# Altium PCB UKU205.PcbDoc (part 1 of 3)
Units mm, origin at the board's own origin, x right, y up, seen from the top; angles counter-clockwise.
Board outline 374.65 x 264.35 mm, 2 copper layers (Top Layer, Bottom Layer); 253 components, 433 nets, 927 pads, 929 vias.
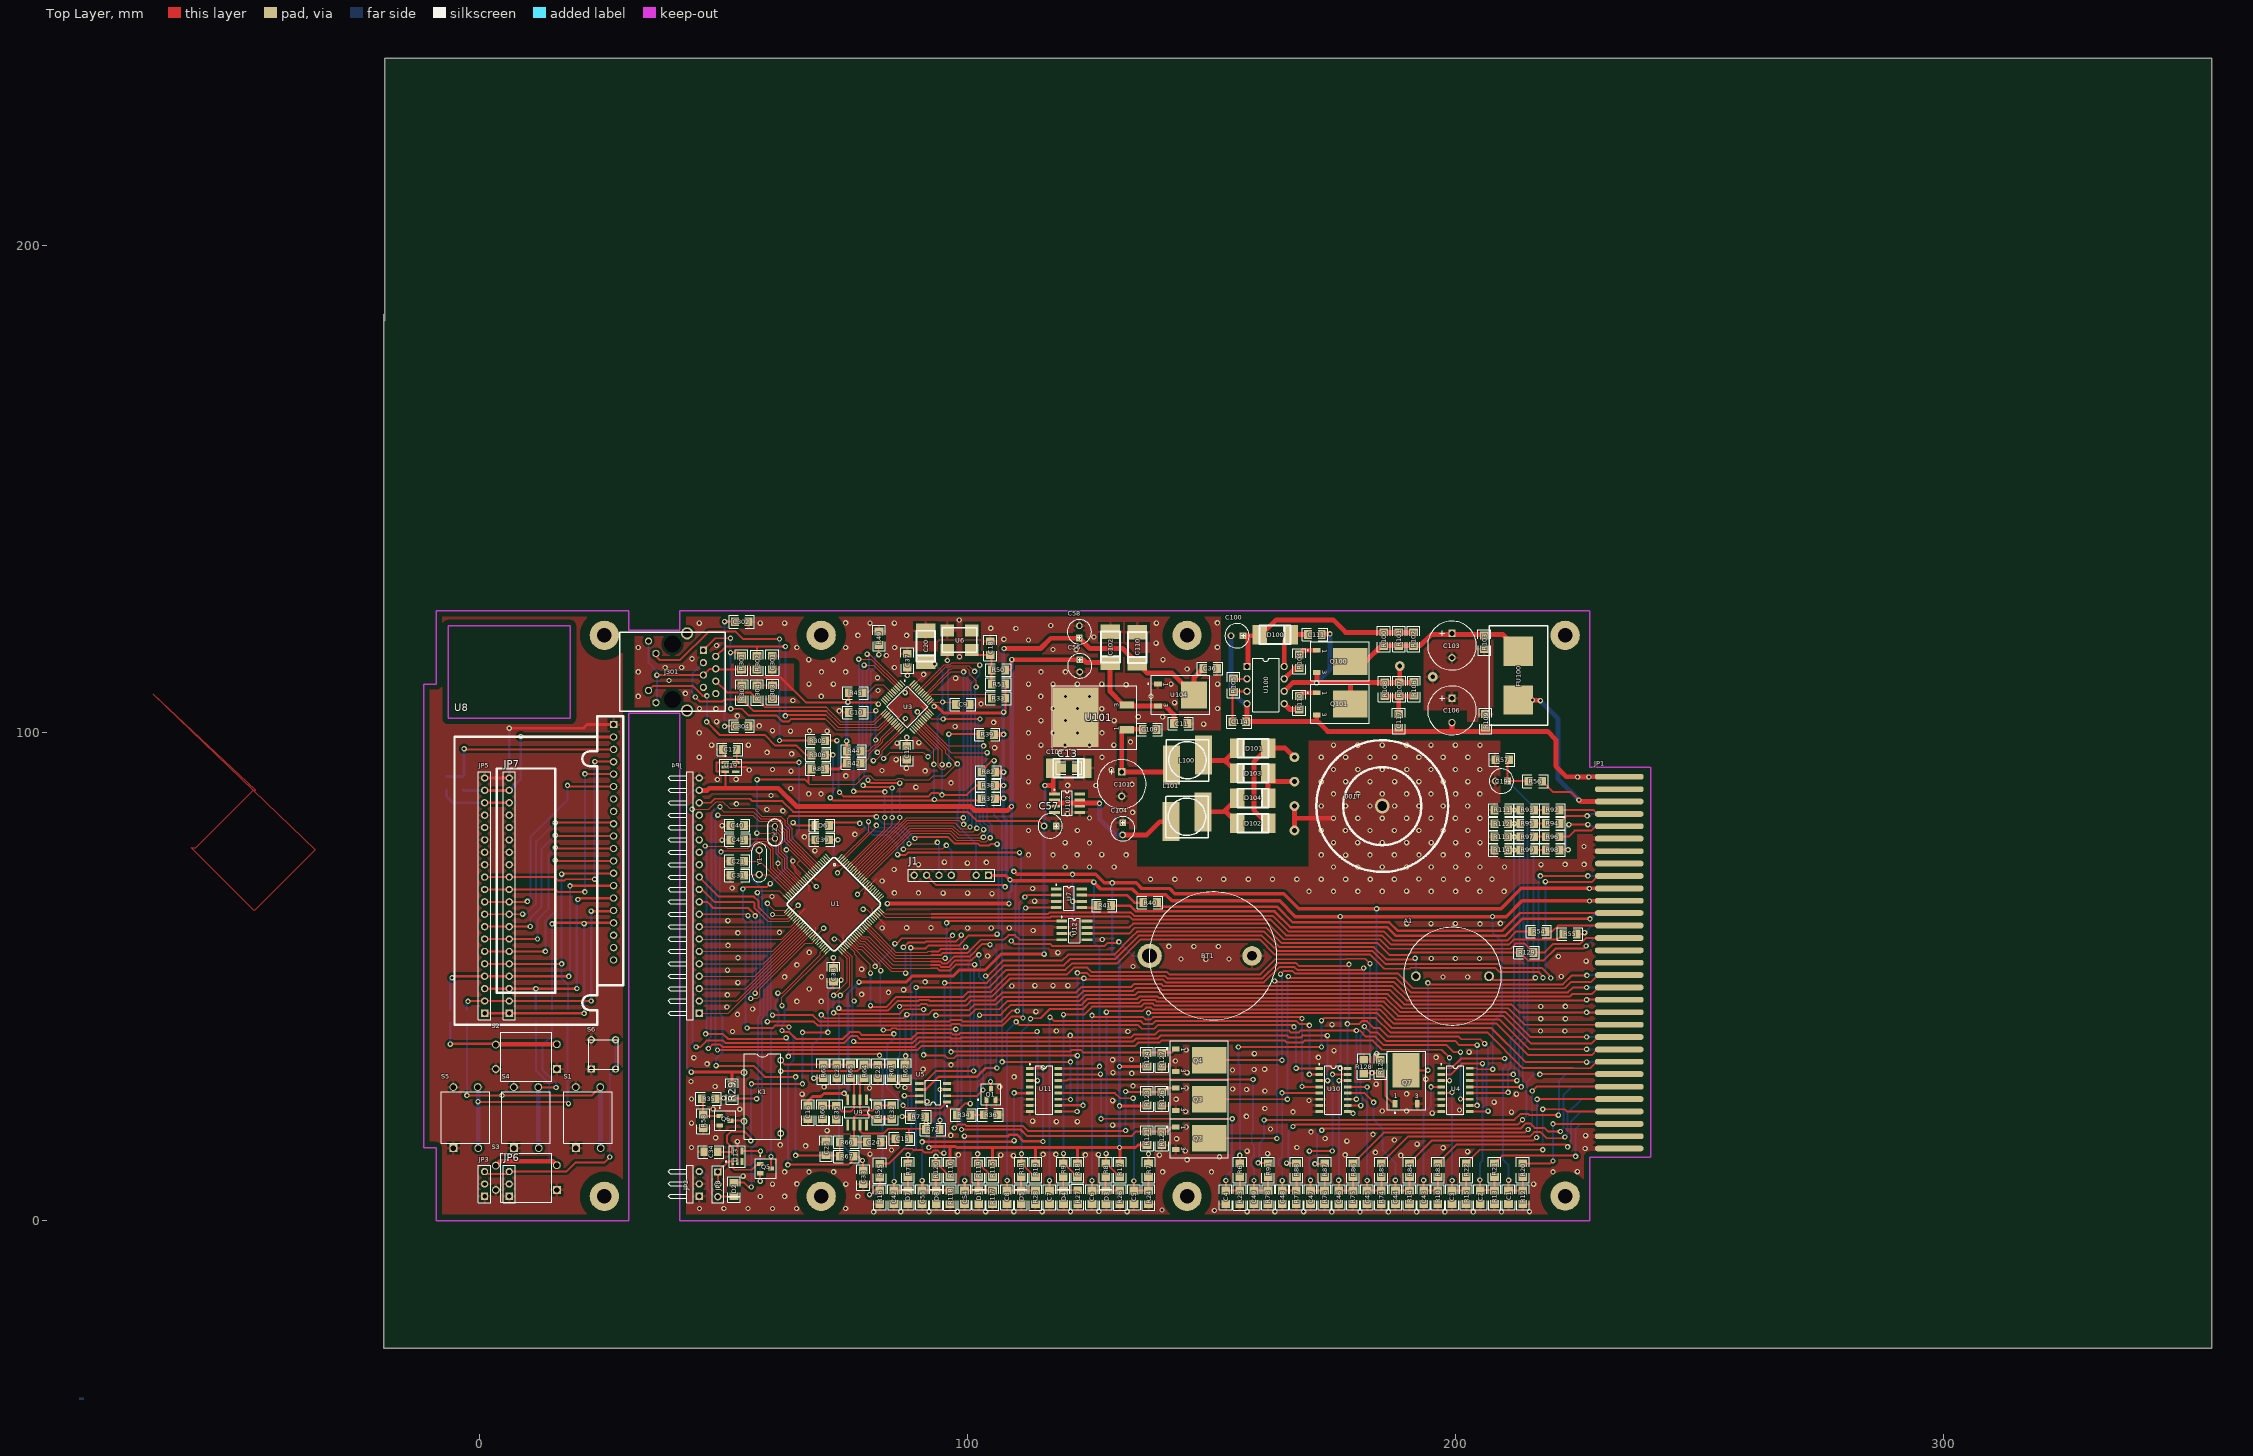
[diagram p0: Top Layer view]
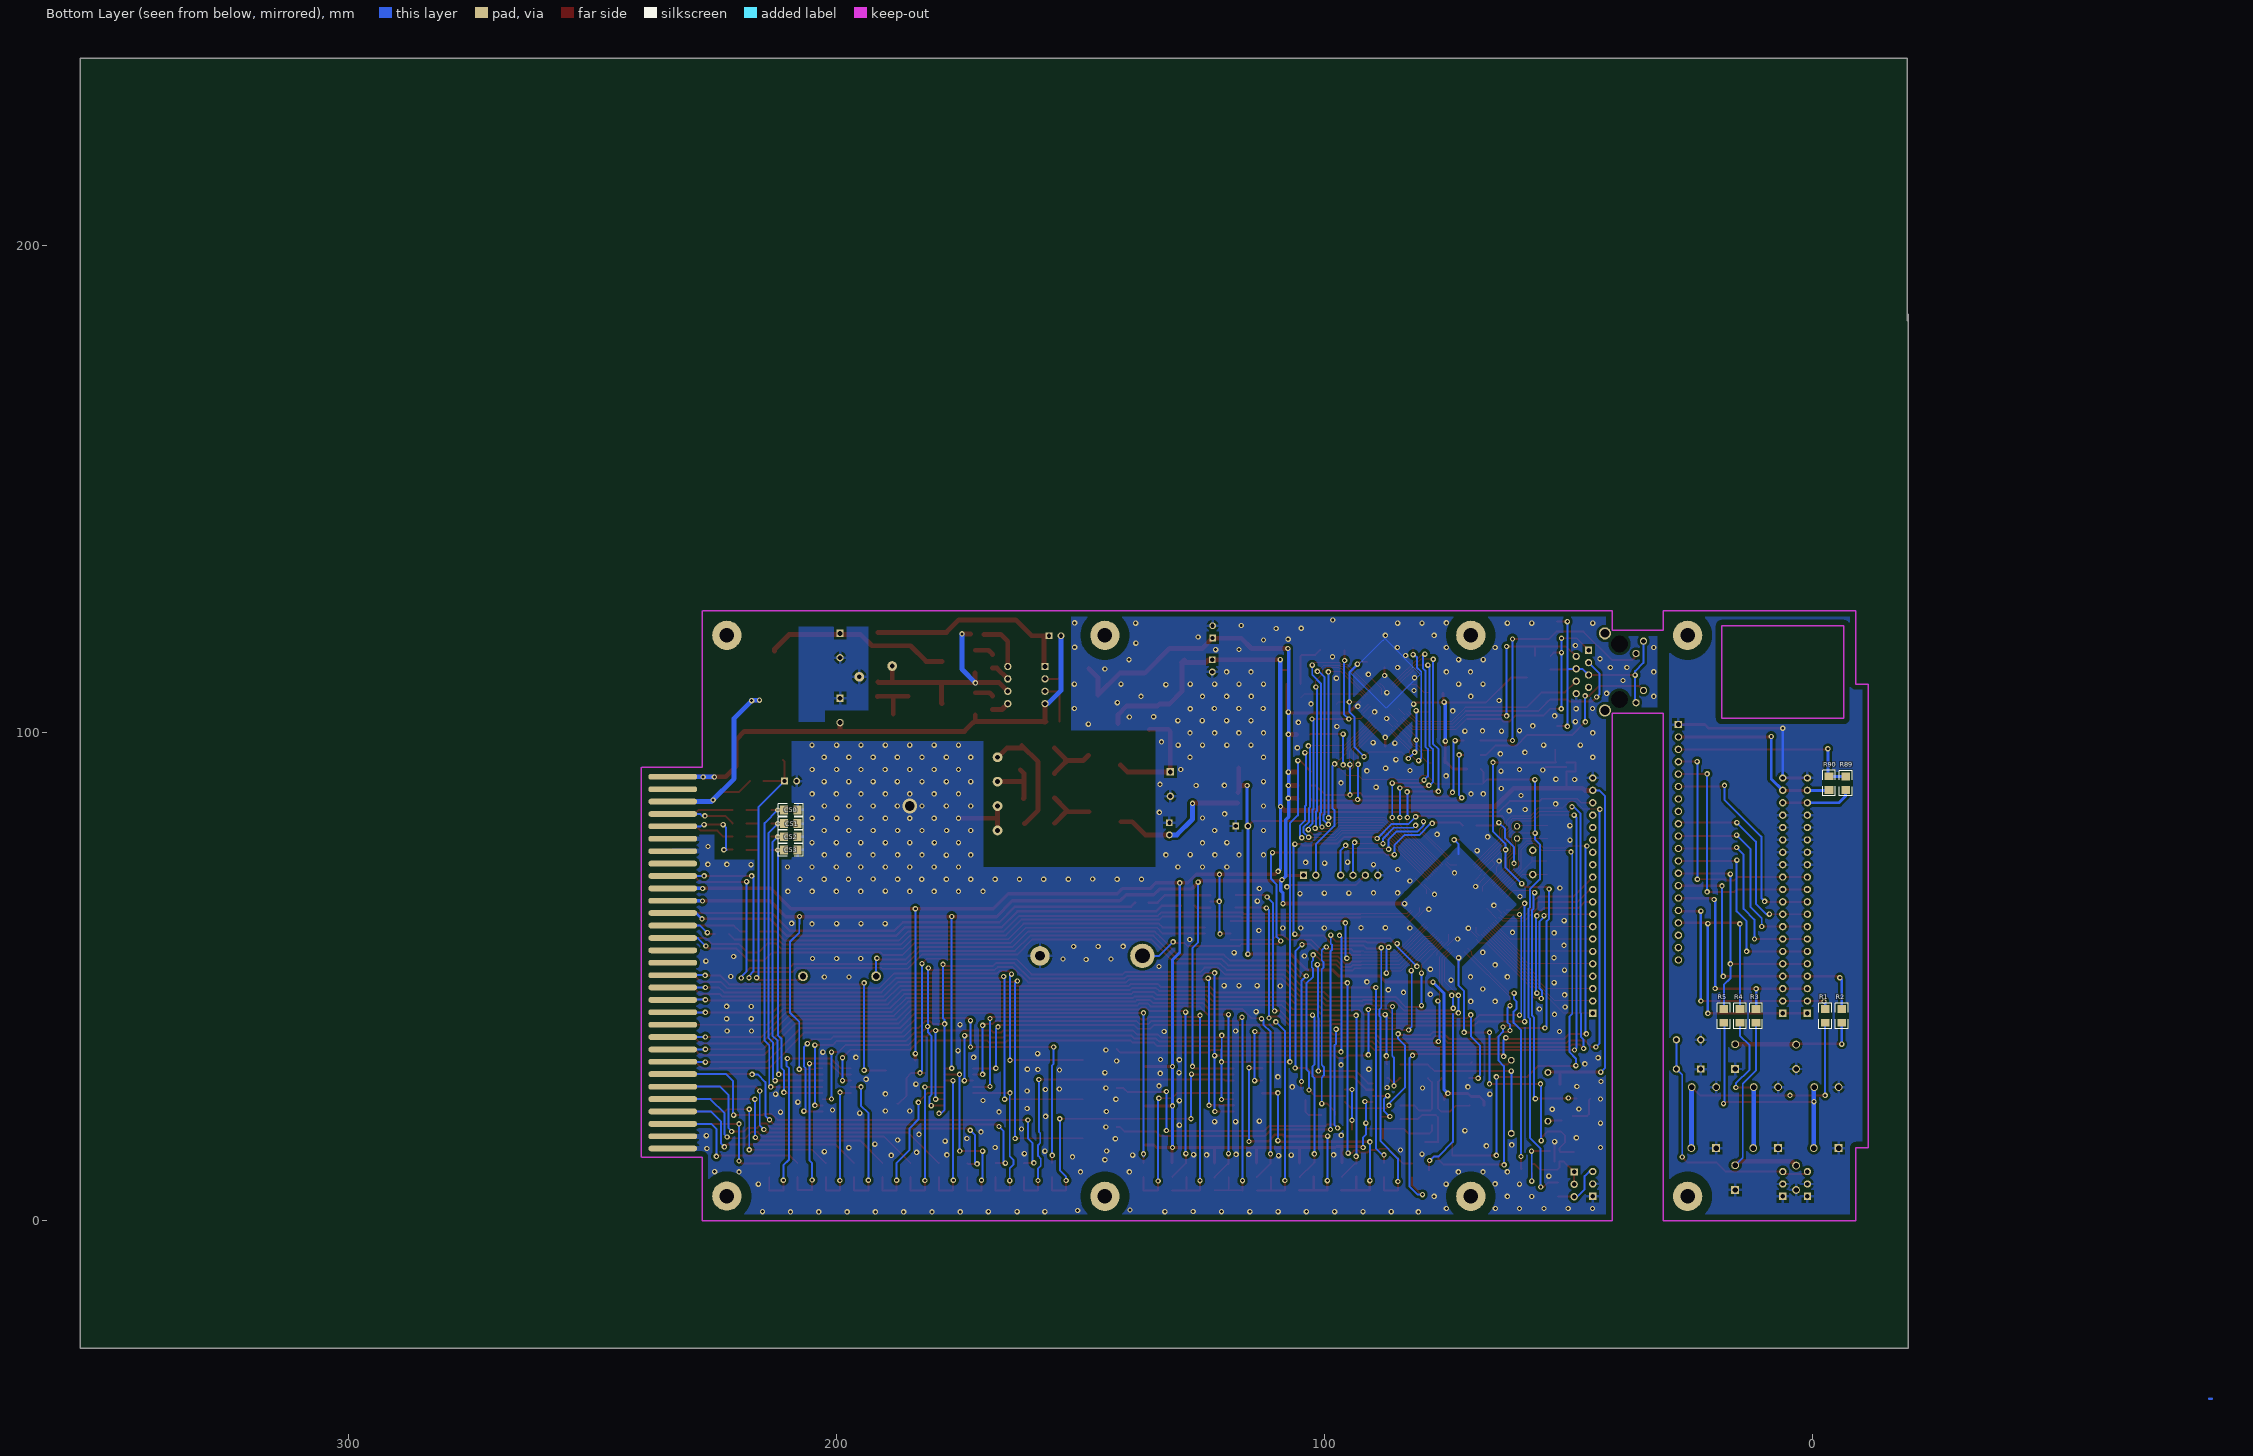
[diagram p1: Bottom Layer view, seen from below]

## Layer stack, top to bottom
Top Layer: signal copper 0.0356
Dielectric: dielectric 0.32, FR-4, Dk 4.8
Bottom Layer: signal copper 0.0356

## Board outline
-19.65,185.8 -19.65,-26.1 355,-26.1 355,238.25 -19.45,238.25 -19.45,184.45

## Design rules (kind name [scope] priority, off if disabled: settings)
Clearance Clearance_1 [InPoly vs InNet('+5VIZ') Or InNet('-5VIZ')] p1: gap=1
Clearance "Для разъёма" [InComponent(JP1)] p2: gap=0.6
Clearance Poly_Poly [InPoly vs InPoly] p3: gap=1
Clearance Keep_Out [OnLayer('Keep-Out Layer') vs Not InNet('NetJ2_5')] p4: gap=1
Clearance Holes [InPoly vs HasPad('Free-0')  Or HasPad('J2-10')  Or HasPad('J2-11')] p5: gap=2
Clearance Poly [InPoly] p6: gap=0.5
Clearance [All] p7: gap=0.15
Clearance Высоковольтное [InNet('+UOUT') or
InNet('U1') or
InNet('U2') or
InNet('UAKB') or
InNet('-UOUT') vs InPoly] p8: gap=0.6
ComponentClearance [All] p1: gap=0.254 collisioncheckmode=0
HoleSize [All] p1: absolutevalues=TRUE maxlimit=5 minlimit=0.025 maxpercent=80.000 minpercent=20.000
PolygonConnect PolygonConnect_2 [InComponent(JP1)] p1: connectstyle=Relief reliefconductorwidth=1 reliefentries=4 polygonreliefangle="90 Angle"
PolygonConnect PolygonConnect_1 [HasPad('JP101-7') or
HasPad('JP6-7') or
HasPad('JP6-9') or
HasPad('JP6-10') Or InComponent(U101)] p2: connectstyle=Direct reliefconductorwidth=0.254 reliefentries=4 polygonreliefangle="90 Angle"
PolygonConnect [All] p3: connectstyle=Relief reliefconductorwidth=0.5 reliefentries=4 polygonreliefangle="90 Angle"
RoutingLayers [All] p1: top layer=Horizontal bottom layer=Vertical
RoutingVias [All] p1: holewidth=0.6 width=1.1 viastyle="Through Hole" minholewidth=0.6 minwidth=1.1 maxholewidth=0.7 maxwidth=1.2
SolderMaskExpansion [All] p1: expansion=0.102
TestPointUsage [All] p1: valid=0 allowmultiple=FALSE
Testpoint [All] p1: side=15 testpointundercomponent=TRUE minsize=1.016 maxsize=2.54 preferedsize=1.524 minholesize=0 maxholesize=1.016 preferedholesize=0.813 testpointgrid=0.025 style=1023 order=-539222988
Width [All] p1: maxlimit=2 minlimit=0.2 preferedwidth=0.254 toplayer_prefwidth=0.5 bottomlayer_prefwidth=0.4 minimp=50.000000 maximp=50.000000 favimp=50.000000
15 further rules are at their usual default settings.

## Classes and differential pairs
component class ETHERNET: C9 C10 C12 C18 C20 C301 C302 C303 C304 J301 R33 R37 R38 R39 R42 R44 R45 R49 R50 R51 R301 R302 R303 R304 R305 R306 U3 U6
component class POWER: BT1 C11 C13 C36 C56 C57 C58 C100 C101 C102 C103 C104 C105 C106 C109 C110 C111 C114 C117 D6 D100 D101 D102 D103 D104 FU100 L100 L101 Q100 Q101 R100 R101 R102 R103 R104 R105 R106 R107 R108 R109 R110 T100 U100 U101 U102 U104
component class cpu_board: A1 C15 C16 C17 C19 C21 C22 C23 C24 C25 C31 C32 C33 C34 C35 C37 C38 C39 C40 C41 D2 J1 JP1 JP2 JP4 JP8 K1 Q1 Q5 Q6 R29 R34 R35 R36 R40 R41 R54 R55 R56 R57 R58 R59 R60 R61 R62 R63 R64 R65 R66 R67 R81 R82 R129 U1 U7 U9 U12 U13 U19 Y1 Y2
component class FACE: JP3 JP5 JP6 JP7 R1 R2 R3 R4 R5 R89 R90 S1 S2 S3 S4 S5 S6 TX0 U8
component class RS232: R72 R73 U5
component class ANALOG_: C1 C2 C3 C4 C5 C6 C7 C8 C42 C43 C44 C45 C46 C47 C48 C49 C50 C51 C52 C53 C54 C55 D1 D3 D4 D5 D7 D8 Q2 Q3 Q4 Q7 R6 R7 R8 R9 R10 R11 R12 R13 R14 R15 R16 R17 R18 R19 R20 R21 R22 R23 R24 R25 R26 R27 R28 R71 R74 R75 R76 R77 R78 R83 R84 R85 R86 R87 R88 R91 R92 R93 R94 R95 R96 R97 R98 R99 R111 R112 R113 R114 R115 R116 R117 R118 R119 R120 R121 R122 R123 R124 R125 R126 R127 R128 U4 U10 U11

## Components (designator, comment, footprint, x,y, rotation, side; value= is the part's Value field where it differs from the comment)
A1 "EFM-260" Pjezo15 194.4,50.1 r0 top
BT1 "CR2032" BAT_SUPP 150.3,54.3 r90 top
C1 "1.0" C3216-1206#1 210.9,4.8 r270 top
C2 "1.0" C3216-1206#1 205.1,4.8 r270 top
C3 "1.0" C3216-1206#1 199.3,4.8 r270 top
C4 "1.0" C3216-1206#1 152.9,4.8 r270 top
C5 "1.0" C3216-1206#1 134.1,4.8 r270 top
C6 "1.0" C3216-1206#2 125.5,4.8 r270 top
C7 "1.0" C3216-1206#2 116.8,4.8 r270 top
C8 "1.0" _1206#1 108.1,4.8 r270 top
C9 "0.1" C3216-1206#1 99.05,105.8 r0 top
C10 "0.1" C3216-1206#1 77.05,104.2 r180 top
C11 "1.0" C3216-1206#3 143.7,101.9 r180 top
C12 "0.1" _1206#2 87.55,95.9 r270 top
C13 "1.0" C3216-1206#3 120.8,92.8 r0 top
C15 "1.0" C3216-1206#1 86.6,16.8 r0 top
C16 "1.0" C3216-1206#1 67.3,22.2 r90 top
C17 "1.0" _1206#2 51.3,96.6 r0 top
C18 "0.1" _1206#2 104.65,117.4 r90 top
C19 "22.0x50" el3 210.7,90.1 r180 top
C20 "10.0x25 tantal" CAP_EL_6_3#1 91.45,114.6 r90 top
C21 "10" _1206#2 52.8,73.7 r0 top
C22 "1.0" _1206#2 81.6,30.6 r90 top
C23 "1.0" _1206#2 73.2,30.6 r270 top
C24 "1.0" _1206#2 80.8,16.1 r180 top
C25 "1.0" _1206#2 71,14.8 r270 top
C31 "10" _1206#2 52.8,70.8 r0 top
C32 "0.1" _1206#2 84.45,22.25 r270 top
C33 "1.0" _1206#2 78.6,8.9 r90 top
C34 "1.0" _1206#1 47.4,14.1 r180 top
C35 "0.1" _1206#2 73.1,22.15 r270 top
C36 "0.1" C3216-1206#3 149.7,113.2 r180 top
C37 "1.0" _1206#2 87.65,114.8 r270 top
C38 "1.0" _1206#2 72.5,50.4 r90 top
C39 "1.0" _1206#2 70.2,78.1 r0 top
C40 "33" _1206#2 52.8,81 r0 top
C41 "33" _1206#2 52.8,78.05 r0 top
C42 "1n0" _1206#2 84.9,4.8 r270 top
C43 "1.0" C3216-1206#3 193.5,4.8 r270 top
C44 "1.0" C3216-1206#3 187.7,4.8 r270 top
C45 "1.0" C3216-1206#3 181.9,4.8 r270 top
C46 "1.0" C3216-1206#3 176.1,4.8 r270 top
C47 "1.0" C3216-1206#3 170.3,4.8 r270 top
C48 "1.0" C3216-1206#3 164.5,4.8 r270 top
C49 "1.0" C3216-1206#3 158.7,4.8 r270 top
C50 "1.0" C3216-1206#3 209.4,84.2 r180 bottom
C51 "1.0" C3216-1206#3 209.4,81.4 r180 bottom
C52 "1.0" C3216-1206#3 209.4,78.7 r180 bottom
C53 "1.0" C3216-1206#3 209.4,76 r180 bottom
C54 "1.0" _1206#1 99.4,4.8 r270 top
C55 "1.0" _1206#1 90.7,4.8 r270 top
C56 "22.0 x 35" el3 123,115 r270 top
C57 "22.0 x 35" el3 118.2,80.9 r180 top
C58 "22.0 x 35" el3 122.899,119.45 r90 top
C100 "22.0x50" el3 156.5,119.9 r180 top
C101 "220.0x25" el5 131.6,87 r90 top
C102 "10.0x25 tantal" CAP_EL_6_3#1 129.3,114.4 r90 top
C103 "220.0x63" el5 199.293,115.4 r90 top
C104 "22.0 x 35" el3 131.8,81.6 r270 top
C105 "10.0x25 tantal" CAP_EL_6_3#1 123.9,92.8 r180 top
C106 "220.0x63" el5 199.293,102.1 r90 top
C109 "0.1" C3216-1206#1 137.3,100.7 r180 top
C110 "10.0x25 tantal" CAP_EL_6_3#2 134.8,114.3 r90 top
C111 "0.1" C3216-1206#1 171.2,120.15 r0 top
C114 "1n0x1000" _1206#2 155.7,102.3 r0 top
C117 "1n0x1000" _1206#2 188.4,102.45 r270 top
C301 "0.1" C3216-1206#1 59.95,114.4 r270 top
C302 "0.1" C3216-1206#1 53.7,122.8 r180 top
C303 "0.1" C3216-1206#1 60,108.35 r90 top
C304 "0.1" C3216-1206#1 53.7,101.4 r180 top
D1 "BZV55-C5V6" _1206d#1 102.3,4.8 r270 top
D2 "LL4148" _1206d#2 52.1,6.4 r90 top
D3 "BZV55-C5V6" _1206d#1 128.4,4.8 r270 top
D4 "BZV55-C5V6" _1206d#1 119.7,4.8 r270 top
D5 "BZV55-C5V6" _1206d#1 111,4.8 r270 top
D6 "LL4148" _1206d#2 70.2,81 r0 top
D7 "BZV55-C3V9" _1206d#2 87.8,4.8 r270 top
D8 "BZV55-C5V6" _1206d#1 93.6,4.8 r270 top
D100 "10BQ060" D_6_3 166.2,120.1 r180 top
D101 "10BQ060" D_6_3 155.318,96.863 r0 top
D102 "10BQ060" D_6_3 161.65,81.487 r180 top
D103 "10BQ060" D_6_3 155.318,91.7 r0 top
D104 "10BQ060" D_6_3 161.65,86.65 r180 top
FU100 "5A(2Б-1В)" FUSE2 212.9,111.75 r90 top
J1 "LPC_CONN" HDR1X7 104.3,70.8 r180 top
J301 "J0011D21B" J0011D21B 39.5,112.5 r90 top
JP1 "Header 31X2" sl-62f 233.6,91 r270 top
JP2 "Header 3H" HDR1X3H 45,5 r90 top
JP3 "Header 3" HDR1X3#1 1,5 r90 top
JP4 "Header 20H" HDR1X20H 45,42.5 r90 top
JP5 "Header 20" HDR1X20 1,42.5 r90 top
JP6 "Header 3" HDR1X3#1 6.05,5 r90 top
JP7 "Header 20" HDR1X20 6.05,42.5 r90 top
JP8 "PLS-3" HDR1X3#2 48.8,10 r270 top
K1 "DH1A" kuan 54.2,32.9 r270 top
L100 "SDR0805-390KL" L10x10 140,99.5 r270 top
L101 "SDR0805-390KL" L10x10 139.9,87.9 r270 top
Q1 "BC846" SO-G3#1 104.8,25.9 r0 top
Q2 "IRLR120" SIP-G3/E8#1 146.1,16.9 r270 top
Q3 "IRLR120" SIP-G3/E8#1 146.1,24.9 r270 top
Q4 "IRLR120" SIP-G3/E8#1 146.1,32.9 r270 top
Q5 "IRLML2402" SO-G3#2 58.6,10.7 r270 top
Q6 "BC846" SO-G3#1 50.3,20.5 r270 top
Q7 "IRLR120" SIP-G3/E8#1 189.9,27.4 r0 top
Q100 "IRFR120" SIP-G3/E8#2 175,114.65 r270 top
Q101 "IRFR120" SIP-G3/E8#2 175,105.95 r270 top
R1 "2K7" _1206#2 -2.65,42 r90 bottom
R2 "2K7" _1206#2 -6.05,42 r90 bottom
R3 "2K7" _1206#2 11.516,42 r90 bottom
R4 "2K7" _1206#2 14.824,42 r90 bottom
R5 "2K7" _1206#2 18.132,42 r90 bottom
R6 "2K7" _1206#2 155.8,10.4 r90 top
R7 "2K7" _1206#2 137.1,10.4 r90 top
R8 "2K7" _1206#1 128.3,10.4 r90 top
R9 "2K7" _1206#1 119.6,10.4 r90 top
R10 "1K0" _1206#1 196.4,4.8 r270 top
R11 "2K7" _1206#1 111,10.4 r90 top
R12 "1K0" _1206#2 213.8,4.8 r270 top
R13 "1K0" _1206#2 208,4.8 r270 top
R14 "1K0" _1206#1 190.6,4.8 r270 top
R15 "1K0" _1206#2 202.2,4.8 r270 top
R16 "1K0" _1206#2 82,4.8 r270 top
R17 "1K0" _1206#1 131.2,10.4 r90 top
R18 "1K0" _1206#1 122.5,10.4 r90 top
R19 "1K0" _1206#1 113.9,10.4 r90 top
R20 "33K" _1206#2 213.8,10.4 r90 top
R21 "33K" _1206#2 208,10.4 r90 top
R22 "33K" _1206#2 202.2,10.4 r90 top
R23 "10K" _1206#2 155.8,4.8 r90 top
R24 "10K" _1206#2 137.1,4.8 r90 top
R25 "10K" _1206#2 82,10.3 r90 top
R26 "10K" _1206#1 131.2,4.8 r90 top
R27 "10K" _1206#1 122.55,4.85 r90 top
R28 "10K" _1206#1 113.9,4.8 r90 top
R29 "1K0" _1206#2 51.7,26.5 r270 top
R33 "2K2" _1206#2 106.35,107.1 r0 top
R34 "1K0" _1206#2 99.2,21.7 r0 top
R35 "1K0" _1206#2 46.9,25 r180 top
R36 "10K" _1206#2 104.7,21.7 r180 top
R37 "2K2" _1206#2 104.25,86.5 r0 top
R38 "2K2" _1206#2 104.25,89.2 r0 top
R39 "2K2" _1206#2 104.05,99.7 r0 top
R40 "K10" _1206#2 137.4,65.2 r180 top
R41 "K10" _1206#2 128,64.6 r180 top
R42 "2K2" _1206#2 76.65,93.8 r180 top
R44 "2K2" _1206#2 76.65,96.3 r180 top
R45 "10K" _1206#2 77.05,108.2 r180 top
R49 "4K87" _1206#2 81.85,119.4 r270 top
R50 "1R" _1206#2 106.35,112.9 r0 top
R51 "1R" _1206#2 106.35,110 r0 top
R54 "1K0" _1206#2 217.1,59.3 r0 top
R55 "1K0" _1206#2 223.5,58.8 r0 top
R56 "10K" _1206#2 216.4,90.1 r0 top
R57 "2K7" _1206#2 209.6,94.5 r0 top
R58 "10K" _1206#2 45.8,20.4 r90 top
R59 "20K" _1206#2 81.6,22.25 r90 top
R60 "20K" _1206#2 70.25,22.2 r90 top
R61 "10R" _1206#2 84.4,30.6 r270 top
R62 "10R" _1206#2 87.2,30.6 r270 top
R63 "10R" _1206#2 70.4,30.6 r270 top
R64 "2K0" _1206#2 78.8,30.6 r270 top
R65 "2K0" _1206#2 76,30.6 r270 top
R66 "20K" _1206#2 75.2,16.1 r180 top
R67 "20K" _1206#2 75.2,13.2 r0 top
R71 "2K7" _1206#2 87.8,10.4 r90 top
R72 "2K7" _1206#1 92.9,18.7 r180 top
R73 "2K7" _1206#1 89.9,21.3 r180 top
R74 "1K0" _1206#1 184.8,4.8 r270 top
R75 "1K0" _1206#1 179,4.8 r270 top
R76 "1K0" _1206#1 173.2,4.8 r270 top
R77 "1K0" _1206#1 167.4,4.8 r270 top
R78 "1K0" _1206#1 161.6,4.8 r270 top
R81 "10K" _1206#2 69.4,92.6 r0 top
R82 "10K" _1206#2 104.25,92 r180 top
R83 "33K" _1206#1 196.4,10.4 r90 top
R84 "33K" _1206#1 190.6,10.4 r90 top
R85 "33K" _1206#1 184.8,10.4 r90 top
R86 "33K" _1206#1 179,10.4 r90 top
R87 "33K" _1206#1 173.2,10.4 r90 top
R88 "33K" _1206#1 167.4,10.4 r90 top
R89 "7K5" _1206#2 -6.85,89.7 r90 bottom
R90 "2K2" _1206#2 -3.45,89.7 r270 bottom
R91 "33K" _1206#1 161.6,10.4 r90 top
R92 "6K2" _1206#1 219.9,84.2 r180 top
R93 "6K2" _1206#1 214.7,84.2 r180 top
R94 "6K2" _1206#1 219.9,81.4 r180 top
R95 "6K2" _1206#1 214.7,81.4 r180 top
R96 "6K2" _1206#1 219.9,78.7 r180 top
R97 "6K2" _1206#1 214.7,78.7 r180 top
R98 "6K2" _1206#1 219.9,76 r180 top
R99 "6K2" _1206#1 214.7,76 r180 top
R100 "33K" _1206#2 185.299,119.25 r90 top
R101 "33K" _1206#2 188.4,119.25 r90 top
R102 "33K" _1206#2 191.4,119.25 r90 top
R103 "20K" _1206#2 205.9,118.55 r270 top
R104 "22R" _1206#2 168,114.7 r90 top
R105 "15K" _1206#2 154.5,109.8 r90 top
R106 "30R" _1206#2 191.501,109 r270 top
R107 "30R" _1206#2 188.5,108.95 r270 top
R108 "30R" _1206#2 185.5,108.95 r270 top
R109 "20K" _1206#2 206.2,102.45 r270 top
R110 "22R" _1206#2 168,106.2 r90 top
R111 "1K0" _1206#1 209.4,84.2 r0 top
R112 "1K0" _1206#1 209.4,81.4 r0 top
R113 "1K0" _1206#1 209.4,78.7 r0 top
R114 "1K0" _1206#1 209.4,76 r0 top
R115 "1K0" _1206#1 105.1,10.4 r90 top
R116 "1K0" _1206#1 96.4,10.4 r90 top
R117 "10K" _1206#1 105.1,4.8 r90 top
R118 "10K" _1206#1 96.4,4.8 r90 top
R119 "2K7" _1206#1 102.2,10.4 r90 top
R120 "2K7" _1206#1 93.5,10.4 r90 top
R121 "1K0" _1206#1 136.8,16.9 r270 top
R122 "10K" _1206#1 139.8,16.9 r270 top
R123 "1K0" _1206#1 136.8,25 r270 top
R124 "1K0" _1206#1 136.8,33 r270 top
R125 "1K0" _1206#1 184.6,31.6 r90 top
R126 "10K" _1206#1 139.8,25 r270 top
R127 "10K" _1206#1 139.8,33 r270 top
R128 "10K" _1206#1 181.2,31.6 r90 top
R129 "K10" _1206#2 214.6,55 r0 top
R301 "49.9R" _1206#2 53.65,114.4 r270 top
R302 "49.9R" _1206#2 56.85,114.4 r90 top
R303 "49.9R" _1206#2 53.75,108.3 r90 top
R304 "49.9R" _1206#2 56.85,108.3 r270 top
R305 "K10" _1206#2 69.4,98.4 r0 top
R306 "K10" _1206#2 69.4,95.5 r0 top
S1 "SWT-9" SWT-9 19.7,14.9 r90 top
S2 "SWT-9" SWT-9 15.8,31.1 r180 top
S3 "SWT-9" SWT-9 15.8,6.3 r180 top
S4 "SWT-9" SWT-9 7,14.9 r90 top
S5 "SWT-9" SWT-9 -5.4,14.9 r90 top
S6 "SWT-6" SWT-6 22.85,31.1 r90 top
T100 "T-UKU202-60/48" trans_ring1 185,85 r0 top
U1 "LPC2368FBD100" LPC2368 72.6,64.9 r225 top
U3 "DP8348C" F-QFP7X7-G48/N 87.65,105.3 r315 top
U4 "MC14051BD" SO-G16/C5.85#1 200,26.8 r270 top
U5 "25LC640" SO-G8/D5 92.95,26.25 r90 top
U6 "KXO-97-50MGz" KXO-97 98.35,119 r180 top
U7 "UCC37324" SO-G8#1 120.8,66.1 r270 top
U8 "WG1232D" WG1232D 9.45,69.7 r270 top
U9 "OP07CS" SO-G8#1 77.35,22.2 r180 top
U10 "MC14051BD" SO-G16/C5.85#2 175,26.8 r270 top (schematic designator U?)
U11 "MC14051BD" SO-G16/C5.85#2 115.7,26.8 r270 top
U12 "TJA1050" SO-G8#1 121.9,59.5 r270 top
U13 "TPS3823" SO-G5/P.95#1 52.8,13.2 r0 top
U19 "TPS76333" SO-G5/P.95#2 51.4,93 r270 top
U100 "IR2155" DIP-8/D11 161.1,109.8 r270 top
U101 "7805" D2PAK 127.4,103.2 r90 top
U102 "L79L05ACD" SO-G8#2 120.4,85.6 r270 top
U104 "REG1117-3.3" SIP-G3/C7.4 142.7,107.8 r270 top
Y1 "10MGz" QWARZ1 57.3,75.95 r270 top
Y2 "32768" QWARZ2 60.5,80.85 r270 top

## Footprints (in the part's own frame and the unit in brackets; to place one, negate y for a bottom-side part, rotate by r counter-clockwise, add the part's x,y. Pads: shape width x height; smd on the part's side, far side on the other; paste and mask are expansions set on the pad)
_1206#1 [mm]
  rect 1.6x1.8 smd: 1(-1.409,-0.014) 2(1.391,-0.014)
  silkscreen extent -2.61,-1.31 2.59,1.29
_1206#2 [mm]
  rect 1.6x1.8 smd: 1(-1.412,-0.007) 2(1.388,-0.007)
  silkscreen extent -2.61,-1.31 2.59,1.29
_1206d#1 [mm]
  rect 1.6x1.8 smd: 1(1.403,-0.017) 2(-1.397,-0.017)
  silkscreen extent -2.6,-1.32 2.6,1.28
_1206d#2 [mm]
  rect 1.6x1.8 smd: 1(1.395,-0.009) 2(-1.405,-0.009)
  silkscreen extent -2.6,-1.31 2.6,1.29
BAT_SUPP [mm]
  round 5 hole 3: 1(-0.009,12.995)
  round 4 hole 2: 2(-0.009,-8.005)
  silkscreen extent -13.11,-13.11 13.09,13.09
C3216-1206#1 [mm]
  rect 1.6x1.8 smd: 1(-1.405,0.002) 2(1.395,0.002)
  silkscreen extent -2.6,-1.3 2.6,1.3
C3216-1206#2 [mm]
  rect 1.6x1.8 smd: 1(-1.405,-0.006) 2(1.395,-0.006)
  silkscreen extent -2.6,-1.31 2.6,1.29
C3216-1206#3 [mm]
  rect 1.6x1.8 smd: 1(-1.4,0) 2(1.4,0)
  silkscreen extent -2.6,-1.3 2.6,1.3
CAP_EL_6_3#1 [mm]
  rect 3x4 smd: 1(-0.011,0.006) 2(6.339,0.006)
  silkscreen extent -0.01,-1.9 6.34,1.91
CAP_EL_6_3#2 [mm]
  rect 3x4 smd: 1(0.001,0.015) 2(6.351,0.015)
  silkscreen extent 0,-1.89 6.35,1.92
D2PAK [mm]
  rect 1.5x3 smd: 1(-2.558,-5.253) 3(2.522,-5.253)
  rect 12.2x9.3 smd: 2(-0.018,5.247)
  silkscreen extent -6.52,-8.1 6.48,10
D_6_3 [mm]
  rect 3x4 smd: 1(6.341,0.006) 2(-0.009,0.006)
  silkscreen extent -0.01,-1.9 6.34,1.91
DIP-8/D11 [mm]
  rect 1.5x1.5 hole 0.95: 1(-3.803,-3.816)
  round 1.5 hole 0.95: 2(-1.263,-3.816) 3(1.277,-3.816) 4(3.817,-3.816) 5(3.817,3.804) 6(1.277,3.804) 7(-1.263,3.804) 8(-3.803,3.804)
  silkscreen extent -5.49,-2.66 5.51,2.64
el3 [mm]
  rect 1.4x1.4 hole 0.85: 1(0.011,-0.008)
  round 1.4 hole 0.85: 2(2.511,-0.008)
  silkscreen extent -1.24,-2.51 3.76,2.49
el5 [mm]
  rect 1.5x1.5 hole 1: 1(5.001,0.007)
  round 1.5 hole 1: 2(0.001,0.007)
  silkscreen extent -2.5,-4.99 7.5,5
F-QFP7X7-G48/N [mm]
  rect 1.55x0.3 smd: 1(-4.192,2.749) 2(-4.192,2.249) 3(-4.192,1.749) 4(-4.192,1.249) 5(-4.192,0.749) 6(-4.192,0.249) 7(-4.192,-0.251) 8(-4.192,-0.751) 9(-4.192,-1.251) 10(-4.192,-1.751) 11(-4.192,-2.251) 12(-4.192,-2.751) 25(4.158,-2.751) 26(4.158,-2.251) 27(4.158,-1.751) 28(4.158,-1.251) 29(4.158,-0.751) 30(4.158,-0.251) 31(4.158,0.249) 32(4.158,0.749) 33(4.158,1.249) 34(4.158,1.749) 35(4.158,2.249) 36(4.158,2.749)
  rect 0.3x1.55 smd: 13(-2.767,-4.176) 14(-2.267,-4.176) 15(-1.767,-4.176) 16(-1.267,-4.176) 17(-0.767,-4.176) 18(-0.267,-4.176) 19(0.233,-4.176) 20(0.733,-4.176) 21(1.233,-4.176) 22(1.733,-4.176) 23(2.233,-4.176) 24(2.733,-4.176) 37(2.733,4.174) 38(2.233,4.174) 39(1.733,4.174) 40(1.233,4.174) 41(0.733,4.174) 42(0.233,4.174) 43(-0.267,4.174) 44(-0.767,4.174) 45(-1.267,4.174) 46(-1.767,4.174) 47(-2.267,4.174) 48(-2.767,4.174)
  silkscreen extent -4.32,-3 2.98,3.57
FUSE2 [mm]
  rect 6x6 smd: 1(-4.999,-0.006) 2(5.001,-0.006)
  silkscreen extent -10.16,-6.01 10.16,5.99
HDR1X3#1 [mm]
  rect 1.5x1.5 hole 0.9: 1(-0.009,0.011)
  round 1.5 hole 0.9: 2(2.531,0.011) 3(5.071,0.011)
  silkscreen extent -1.28,-1.26 6.34,1.28
HDR1X3#2 [mm]
  rect 1.5x1.5 hole 0.9: 1(0,0)
  round 1.5 hole 0.9: 2(2.54,0) 3(5.08,0)
  silkscreen extent -1.27,-1.27 6.35,1.27
HDR1X3H [mm]
  rect 1.5x1.5 hole 0.9: 1(0,0)
  round 1.5 hole 0.9: 2(2.54,0) 3(5.08,0)
  silkscreen extent -1.27,1.27 6.35,6.35
HDR1X7 [mm]
  rect 1.5x1.5 hole 0.95: 1(0,-0.008)
  round 1.5 hole 0.95: 2(2.54,-0.008) 4(7.62,-0.008) 5(10.16,-0.008) 6(12.7,-0.008) 7(15.24,-0.008)
  silkscreen extent -1.27,-1.28 16.51,1.26
HDR1X20 [mm]
  rect 1.5x1.5 hole 0.9: 1(0,0)
  round 1.5 hole 0.9: 2(2.54,0) 3(5.08,0) 4(7.62,0) 5(10.16,0) 6(12.7,0) 7(15.24,0) 8(17.78,0) 9(20.32,0) 10(22.86,0) 11(25.4,0) 12(27.94,0) 13(30.48,0) 14(33.02,0) 15(35.56,0) 16(38.1,0) 17(40.64,0) 18(43.18,0) 19(45.72,0) 20(48.26,0)
  silkscreen extent -1.27,-1.27 49.53,1.27
HDR1X20H [mm]
  rect 1.5x1.5 hole 0.9: 1(0,0)
  round 1.5 hole 0.9: 2(2.54,0) 3(5.08,0) 4(7.62,0) 5(10.16,0) 6(12.7,0) 7(15.24,0) 8(17.78,0) 9(20.32,0) 10(22.86,0) 11(25.4,0) 12(27.94,0) 13(30.48,0) 14(33.02,0) 15(35.56,0) 16(38.1,0) 17(40.64,0) 18(43.18,0) 19(45.72,0) 20(48.26,0)
  silkscreen extent -1.27,1.27 49.53,6.35
J0011D21B [mm]
  round 2.5 hole 1.8: 0(-7.9,-3) 0(7.9,-3)
  round 1.5 hole 3.5: 0(-5.7,0) 0(5.7,0)
  rect 1.5x1.5 hole 0.95: 1(4.445,-6.35)
  round 1.5 hole 0.95: 2(3.175,-8.9) 3(1.905,-6.35) 4(0.635,-8.9) 5(-0.635,-6.35) 6(-1.905,-8.9) 7(-3.175,-6.35) 8(-4.445,-8.9) 9(6.31,4.9) 10(3.77,3.38) 11(-3.8,4.9) 12(-6.31,3.38)
  silkscreen extent -8.1,-10.8 8.1,10.8
kuan [mm]
  round 1.4 hole 0.85: 1(15.006,7.49) 3(0.006,7.49) 4(2.506,-0.01) 5(12.506,-0.01)
  silkscreen extent -1.34,-0.01 16.21,7.49
KXO-97 [mm]
  rect 2.7x2.5 smd: 1(-2.5,-2) 2(2.5,-2) 3(2.5,2) 4(-2.5,2)
  silkscreen extent -3.5,-2.5 3.5,2.5
L10x10 [mm]
  rect 8x3.5 smd: 1(4.075,8.372) 2(6.107,1.768)
  silkscreen extent 0.9,0.75 9.41,9.39
LPC2368 [mm]
  rect 0.25x1.5 smd: 1(-6,-7.775)
  oval 0.25x1.5 smd: 2(-5.5,-7.75) 3(-5,-7.75) 4(-4.5,-7.75) 5(-4,-7.75) 6(-3.5,-7.75) 7(-3,-7.75) 8(-2.5,-7.75) 9(-2,-7.75) 10(-1.5,-7.75) 11(-1,-7.75) 12(-0.5,-7.75) 13(0,-7.75) 14(0.5,-7.75) 15(1,-7.75) 16(1.5,-7.75) 17(2,-7.75) 18(2.5,-7.75) 19(3,-7.75) 20(3.5,-7.75) 21(4,-7.75) 22(4.5,-7.75) 23(5,-7.75) 24(5.5,-7.75) 25(6,-7.75) 51(6,7.75) 52(5.5,7.75) 53(5,7.75) 54(4.5,7.75) 55(4,7.75) 56(3.5,7.75) 57(3,7.75) 58(2.5,7.75) 59(2,7.75) 60(1.5,7.75) 61(1,7.75) 62(0.5,7.75) 63(0,7.75) 64(-0.5,7.75) 65(-1,7.75) 66(-1.5,7.75) 67(-2,7.75) 68(-2.5,7.75) 69(-3,7.75) 70(-3.5,7.75) 71(-4,7.75) 72(-4.5,7.75) 73(-5,7.75) 74(-5.5,7.75) 75(-6,7.75)
  oval 1.5x0.25 smd: 26(7.75,-6) 27(7.75,-5.5) 28(7.75,-5) 29(7.75,-4.5) 30(7.75,-4) 31(7.75,-3.5) 32(7.75,-3) 33(7.75,-2.5) 34(7.75,-2) 35(7.75,-1.5) 36(7.75,-1) 37(7.75,-0.5) 38(7.75,0) 39(7.75,0.5) 40(7.75,1) 41(7.75,1.5) 42(7.75,2) 43(7.75,2.5) 44(7.75,3) 45(7.75,3.5) 46(7.75,4) 47(7.75,4.5) 48(7.75,5) 49(7.75,5.5) 50(7.75,6) 76(-7.75,6) 77(-7.75,5.5) 78(-7.75,5) 79(-7.775,4.475) 80(-7.75,4) 81(-7.75,3.5) 82(-7.75,3) 83(-7.75,2.5) 84(-7.75,2) 85(-7.75,1.5) 86(-7.75,1) 87(-7.75,0.5) 88(-7.75,0) 89(-7.75,-0.5) 90(-7.75,-1) 91(-7.75,-1.5) 92(-7.75,-2) 93(-7.75,-2.5) 94(-7.775,-3.025) 95(-7.75,-3.5) 96(-7.75,-4) 97(-7.75,-4.5) 98(-7.75,-5) 99(-7.75,-5.5) 100(-7.75,-6)
  silkscreen extent -6.93,-6.93 6.93,6.93
Pjezo15 [mm]
  round 2 hole 1.3: 1(-2.503,0.012) 2(12.497,0.012)
  silkscreen extent -5.02,-10 15.01,10.02
QWARZ1 [mm]
  round 1.5 hole 1: 1(0.008,0) 2(5.008,0)
  silkscreen extent -1.49,-1.5 6.51,1.5
QWARZ2 [mm]
  round 1.3 hole 0.85: 1(0.001,0.005) 2(2.501,0.005)
  silkscreen extent -1.5,-1.5 4,1.5
SIP-G3/C7.4 [mm]
  rect 1x1.6 smd: 1(-2.243,-3.693) 3(2.257,-3.693)
  rect 5.5x5.4 smd: 4(0.007,3.707)
  silkscreen extent -3.99,-5.82 4.01,6.96
SIP-G3/E8#1 [mm]
  rect 1x1.6 smd: 1(-2.288,-3.429) 3(2.282,-3.429)
  rect 5.5x7.1 smd: 4(-0.003,3.421)
  silkscreen extent -4,-5.4 4,7.37
SIP-G3/E8#2 [mm]
  rect 1x1.6 smd: 1(-2.285,-3.431) 3(2.285,-3.431)
  rect 5.5x7.1 smd: 4(0,3.419)
  silkscreen extent -4,-5.41 4,7.37
sl-62f [mm]
  oval 1.2x10 smd: 1(0,-0.011) 3(2.55,-0.011) 5(5.075,-0.011) 7(7.625,-0.011) 9(10.15,-0.011) 11(12.675,-0.011) 13(15.25,-0.011) 15(17.8,-0.011) 17(20.325,-0.011) 19(22.875,-0.011) 21(25.4,-0.011) 23(27.925,-0.011) 25(30.5,-0.011) 27(33.05,-0.011) 29(35.575,-0.011) 31(38.125,-0.011) 33(40.65,-0.011) 35(43.175,-0.011) 37(45.7,-0.011) 39(48.275,-0.011) 41(50.825,-0.011) 43(53.35,-0.011) 45(55.9,-0.011) 47(58.425,-0.011) 49(60.95,-0.011) 51(63.525,-0.011) 53(66.075,-0.011) 55(68.6,-0.011) 57(71.15,-0.011) 59(73.675,-0.011) 61(76.2,-0.011)
  oval 1.2x10 smd far side: 2(0,-0.011) 4(2.55,-0.011) 6(5.075,-0.011) 8(7.625,-0.011) 10(10.15,-0.011) 12(12.7,-0.011) 14(15.25,-0.011) 16(17.8,-0.011) 18(20.325,-0.011) 20(22.875,-0.011) 22(25.4,-0.011) 24(27.925,-0.011) 26(30.5,-0.011) 28(33.05,-0.011) 30(35.575,-0.011) 32(38.125,-0.011) 34(40.675,-0.011) 36(43.175,-0.011) 38(45.725,-0.011) 40(48.275,-0.011) 42(50.825,-0.011) 44(53.35,-0.011) 46(55.9,-0.011) 48(58.425,-0.011) 50(60.95,-0.011) 52(63.525,-0.011) 54(66.075,-0.011) 56(68.6,-0.011) 58(71.15,-0.011) 60(73.7,-0.011) 62(76.2,-0.011)
SO-G3#1 [mm]
  rect 0.85x1.3 smd: 1(-0.948,-1.102) 2(0.952,-1.102) 3(0.002,1.098)
  silkscreen extent -2.77,-2.15 2,2.15
SO-G3#2 [mm]
  rect 0.85x1.3 smd: 1(-0.944,-1.105) 2(0.956,-1.105) 3(0.006,1.095)
  silkscreen extent -2.77,-2.16 2.01,2.14
SO-G5/P.95#1 [mm]
  rect 0.55x1.45 smd: 1(-0.95,-1.075) 2(0,-1.075) 3(0.95,-1.075) 4(0.95,1.075) 5(-0.95,1.075)
  silkscreen extent -2.42,-2.2 1.65,2.2
SO-G5/P.95#2 [mm]
  rect 0.55x1.45 smd: 1(-0.942,-1.066) 2(0.008,-1.066) 3(0.958,-1.066) 4(0.958,1.084) 5(-0.942,1.084)
  silkscreen extent -2.42,-2.19 1.66,2.21
SO-G8#1 [mm]
  rect 0.6x2.2 smd: 1(-1.902,-2.611) 2(-0.632,-2.611) 3(0.638,-2.611) 4(1.908,-2.611) 5(1.908,2.589) 6(0.638,2.589) 7(-0.632,2.589) 8(-1.902,2.589)
  silkscreen extent -2.88,-2.74 2.5,1.09
SO-G8#2 [mm]
  rect 0.6x2.2 smd: 1(-1.905,-2.6) 2(-0.635,-2.6) 3(0.635,-2.6) 4(1.905,-2.6) 5(1.905,2.6) 6(0.635,2.6) 7(-0.635,2.6) 8(-1.905,2.6)
  silkscreen extent -2.88,-2.72 2.5,1.1
SO-G8/D5 [mm]
  rect 0.6x1.7 smd: 1(-1.91,-2.846) 2(-0.64,-2.846) 3(0.63,-2.846) 4(1.9,-2.846) 5(1.9,2.854) 6(0.63,2.854) 7(-0.64,2.854) 8(-1.91,2.854)
  silkscreen extent -2.89,-2.97 2.49,1.6
SO-G16/C5.85#1 [mm]
  rect 0.6x1.55 smd: 1(-4.452,-2.93) 2(-3.182,-2.93) 3(-1.912,-2.93) 4(-0.642,-2.93) 5(0.628,-2.93) 6(1.898,-2.93) 7(3.168,-2.93) 8(4.438,-2.93) 9(4.438,2.92) 10(3.168,2.92) 11(1.898,2.92) 12(0.628,2.92) 13(-0.642,2.92) 14(-1.912,2.92) 15(-3.182,2.92) 16(-4.452,2.92)
  silkscreen extent -5.4,-3.05 4.99,1.75
SO-G16/C5.85#2 [mm]
  rect 0.6x1.55 smd: 1(-4.445,-2.925) 2(-3.175,-2.925) 3(-1.905,-2.925) 4(-0.635,-2.925) 5(0.635,-2.925) 6(1.905,-2.925) 7(3.175,-2.925) 8(4.445,-2.925) 9(4.445,2.925) 10(3.175,2.925) 11(1.905,2.925) 12(0.635,2.925) 13(-0.635,2.925) 14(-1.905,2.925) 15(-3.175,2.925) 16(-4.445,2.925)
  silkscreen extent -5.39,-3.05 5,1.75
SWT-6 [mm]
  rect 1.5x1.5 hole 0.95: 1(-0.009,-0.001)
  round 1.5 hole 0.95: 1(5.991,-0.001) 2(-0.009,-5.001) 2(5.991,-5.001)
  silkscreen extent -0.01,-5.5 5.99,0.5
SWT-9 [mm]
  rect 1.6x1.6 hole 1.1: 1(-0.009,-0.003)
  round 1.6 hole 1.1: 1(12.491,-0.003) 2(-0.009,-5.083) 2(12.491,-5.003)
  silkscreen extent 0.99,-7.5 11.49,2.5
trans_ring1 [mm]
  round 2 hole 1: 1(10.35,26.5) 2(3.6,28.7) 3(-18,10) 4(-18,-5) 5(-18,0) 6(-18,5)
  silkscreen extent -13.5,-13.51 13.5,13.49
WG1232D [mm]
  rect 1.5x1.5 hole 1: 1(-32,18)
  round 1.5 hole 1: 2(-29.46,18) 3(-26.92,18) 4(-24.38,18) 5(-21.84,18) 6(-19.3,18) 7(-16.76,18) 8(-14.22,18) 9(-11.68,18) 10(-9.14,18) 11(-6.6,18) 12(-4.06,18) 13(-1.52,18) 14(1.02,18) 15(3.56,18) 16(6.1,18) 17(8.64,18) 18(11.18,18) 19(13.72,18) 20(16.26,18)
  silkscreen extent -33.72,-14.62 29.51,19.95

## Part data
A1: library part PJEZ0
BT1: library part Battery, "Multicell Battery"
C1 C2 C3 C4 C5 C6 C7 C8 C9 C10 C11 C12 C13 C15 C16 C17 C18 C21 C22 C23 C24 C25 C31 C32 C33 C34 C35 C36 C37 C38 C39 C40 C41 C42 C43 C44 C45 C46 C47 C48 C49 C50 C51 C52 C53 C54 C55 C109 C111 C114 C117 C301 C302 C303 C304: library part "Cap Semi", "Capacitor (Semiconductor SIM Model)"
C19 C20 C56 C57 C58 C100 C101 C102 C103 C104 C105 C106 C110: library part "Cap Pol1", "Polarized Capacitor (Radial)"
D1 D3 D4 D5 D7 D8: library part "D Zener", "Zener Diode"
D2 D6: library part Diode, "Default Diode"
D100 D101 D102 D103 D104: library part 10BQ015, "Schottky Rectifier"
FU100: library part FUSE
JP1: "Header, 30-Pin, Dual row"
JP2: "Header, 3-Pin,  Right Angle"
JP3 JP6: "Header, 3-Pin"
JP4: library part "Header 15H", "Header, 15-Pin, Right Angle"
JP5: library part "Header 15", "Header, 15-Pin"
JP7: "Header, 20-Pin"
JP8: library part "Header 3", "Header, 3-Pin"
K1: library part BS115, "Single-Pole Dual-Throw Relay"
L100 L101: library part "Inductor Konstr 2", "Magnetic-Core Inductor"
Q1 Q6: library part GT122
Q2 Q3 Q4 Q7: library part IRFR120, "HEXFET N-Channel Power MOSFET"
Q5: "HEXFET Power MOSFET"
Q100 Q101: "HEXFET N-Channel Power MOSFET"
R1 R2 R3 R4 R5 R6 R7 R8 R9 R10 R11 R12 R13 R14 R15 R16 R17 R18 R19 R20 R21 R22 R23 R24 R25 R26 R27 R28 R29 R33 R34 R35 R36 R37 R38 R39 R40 R41 R42 R44 R45 R49 R50 R51 R54 R55 R56 R57 R58 R59 R60 R61 R62 R63 R64 R65 R66 R67 R71 R72 R73 R74 R75 R76 R77 R78 R81 R82 R83 R84 R85 R86 R87 R88 R89 R90 R91 R92 R93 R94 R95 R96 R97 R98 R99 R100 R101 R102 R103 R104 R105 R106 R107 R108 R109 R110 R111 R112 R113 R114 R115 R116 R117 R118 R119 R120 R121 R122 R123 R124 R125 R126 R127 R128 R129 R301 R302 R303 R304 R305 R306: library part Res2, "Resistor"
S1 S2 S3 S4 S5: "Switch"
S6: library part SWT-9, "Button"
T100: library part TRANS_RING1
U4 U10 U11: "8-Channel Analog Multiplexer/Demultiplexer"
U6: library part KXO-97
U8: library part WG1232D_pereh
U9: "Ultra-Low Offset Voltage Operational Amplifier"
U13: "Reset IC"
U19: library part LP2980AIM5-3.3, "Micropower SOT, 50 mA Ultra Low-Dropout Regulator"
U100: "Self-Oscillating Half-Bridge Driver"
U101: "3-Terminal Positive Fixed Voltage Regulator"
U102: "Negative Voltage Regulator"
U104: "800mA and 1A Low Dropout Positive Regulator 2.85V, 3.3V, 5V, and Adjustable"
Y1 Y2: library part XTAL, "Crystal Oscillator"

## Free pads (board coordinates)
  round 6 hole 3: 0(25.55,5) 0(25.55,120) 0(70,5) 0(70,120) 0(145,5) 0(145,120) 0(222.5,5.05) 0(222.5,120)

## Via types
v1: diameter 1.1, hole 0.6, Top Layer to Bottom Layer, 928 vias
v2: diameter 3, hole 2, Top Layer to Bottom Layer, 1 vias

## Nets (pads, with @x,y where several pads share a name; then routed paths per layer and width w, separated by ;. In a path a pad name is that pad's centre, name@x,y a point inside that pad or via, vN(x,y) a via of type N, cw(c..) or ccw(c..) an arc to the next point about the centre after c; other vN are vias at no path point)
+3V3: C12.1 C34.1 C36.2 C37.2 C38.2 C39.2 C58.1 C110.1 C301.2 C302.2 C303.2 C304.2 J1.1 J301.4 J301.5 J301.9 J301.12 JP1.21 JP1.22 R33.2 R37.2 R38.2 R39.2 R42.2 R44.2 R45.2 R51.2 R81.2 R82.1 R301.2 R302.1 R303.2 R304.1 U1.13 U1.28 U1.42 U1.54 U1.71 U1.84 U1.96 U3.22 U3.32 U3.48 U4.16 U10.16 U11.16 U13.5 U104.4 | length 625.1
  Top Layer w0.25: U1.28@63.584,62.956 v1(65.279,64.65) ; U1.13@67.12,70.38 v1(69,68.5) ; U1.42@68.534,58.006 70.478,59.95 v1(70.5,59.95) ; v1(72.7,57.75) 73.386,57.75 U1.54@74.898,56.238 ; v1(73.35,71.3) 73.35,71.307 U1.96@75.252,73.209 ; v1(77.45,66.9) 77.45,66.922 U1.84@79.494,68.966 ; v1(78.6,63.85) 79.307,63.85 U1.71@80.909,62.248 ; U3.22@85.922,101.122 87.25,102.449 v1(87.25,102.95) ; v1(87.2,108.25) 87.75,109.313 U3.48@88.645,110.208 ; v1@89.7,104.3 v1(89.709,104.3) U3.32@91.12,102.89 ; R33.2@107.4,107.431 R33.2@107.738,107.093 ; R51.2@107.4,109.656 R51.2@107.738,109.993
  Top Layer w0.4: v1(36.3,111.85) 36.315,111.865 J301.5@45.85,111.865 47.12,113.135 J301.4@48.4,113.135 48.522,113.013 R301.2@53.643,113.013 ; C34.1@48.809,14.115 U13.5@51.69,14.115 ; v1(50.2,101.35) 50.248,101.398 C304.2@52.305,101.398 ; v1(50.2,122.8) 50.202,122.798 C302.2@52.305,122.798 ; U13.5@51.85,14.275 51.85,14.9 50.65,16.1 50.65,17.4 51.55,18.3 54.25,18.3 55.55,17 v1(55.55,16.4) ; v1(55.7,28.05) v1(66.15,28.05) ; 58.45,111.35 61.75,111.35 66.9,106.2 81.4,106.2 v1(81.7,105.9) ; v1(66.15,38.6) v1(71.35,38.6) ; 72.388,78.093 73.393,78.093 v1(73.4,78.1) ; v1(72.5,53.9) 72.507,53.893 C38.2@72.507,51.788 ; C37.2@87.643,113.412 87.643,111.756 v1(87.65,111.75) ; v1(107.4,104.25) 107.738,104.588 R51.2@107.738,109.993 ; U11.16@118.625,31.245 126.645,31.245 v1(127.05,31.65) ; v1(176.4,31.25) 176.405,31.245 U10.16@177.925,31.245 ; U4.16@202.92,31.252 204.348,31.252 204.55,31.05 v1(207.65,31.05)
  Top Layer w0.6: R81.2@70.788,92.593 73.643,92.593 R42.2@75.25,94.2 ; v1@75.212,98.288 75.235,96.306 R42.2@75.262,93.807 ; v1@75.65,106.3 R45.2@75.662,108.207 ; v1(87.527,99.077) 87.527,97.329 C12.1@87.543,97.312 ; v1(93.15,105.45) 93.7,105.45 95.1,104.05 107.2,104.05 v1(107.4,104.25) ; J1.1@104.3,70.808 107.792,70.808 v1(108.7,69.9)
  Top Layer w0.7: v1(108.7,69.9) 108.9,69.7 125.55,69.7 125.875,69.375 127.25,68 133.8,68 134.95,66.85 140.6,66.85 141.9,65.55 164,65.55 167.2,62.35 210.45,62.35 213.65,65.55 233.54,65.55 JP1.21@233.589,65.6
  Top Layer w0.8: v1(83.55,65) v1(108.5,65)
  Top Layer w1: R37.2@105.638,86.493 105.744,86.6 v1(107.4,86.6) ; R38.2@105.644,89.2 v1(107.4,89.2) ; R82.1@105.662,92.007 105.719,91.95 v1(107.4,91.95) ; R39.2@105.738,99.693 v1(107.393,99.693) ; v1(107.5,117.3) 114.95,117.3 117.05,119.4 122.97,119.4 125.07,117.3 131.8,117.3 136.85,112.25 141.95,112.25 U104.4@146.407,107.793 146.45,107.835 146.45,111.35 C36.2@148.3,113.2
  Bottom Layer w0.4: J301.9@34.6,118.81 34.6,114.35 36.3,112.65 36.3,106.37 J301.12@36.12,106.19 ; J301.5@45.85,111.865 47.12,113.135 50.135,113.135 50.2,113.2 ; v1(50.2,101.35) v1(50.2,122.8) ; v1(55.55,16.4) 55.6,16.45 55.6,27.95 v1(55.7,28.05) ; v1@64.929,65 v1(65.279,64.65) ; v1(66.15,28.05) v1(66.15,38.6) ; v1(71.35,38.6) 71.35,47.05 72.5,48.2 v1(72.5,53.9) ; 72.55,75.2 72.55,77.25 v1(73.4,78.1) ; v1(125.9,69.4) 125.95,57 127.05,55.9 v1(127.05,31.65) ; v1(176.4,31.25) v1(176.4,62.35) ; v1(207.6,62.35) 207.65,59.05 209.55,57.15 209.55,42.65 207.65,40.75 v1(207.65,31.05)
  Bottom Layer w0.7: v1@75.212,98.288 75.212,106.062 v1(75.45,106.3) ; v1(107.5,117.3) 107.35,117.15 107.35,82.75 107.95,82.15 107.95,70.65 108.95,69.65 108.95,67.65 108.5,67.2 v1(108.5,65) ; v1(227.5,65.55) 233.54,65.55 JP1.22@233.589,65.6
  other v1: 75.2,98.3
+3V3A: C17.2 C33.2 R67.2 U1.10 U1.12 U19.5 | length 179.2
  Top Layer w0.25: v1(62.85,76.05) 63.571,76.05 U1.10@68.181,71.441 ; 65.734,73.888 65.1,73.254 65.1,73.107 U1.12@67.474,70.734 ; R67.2@76.588,13.193 R67.2@76.594,13.2
  Top Layer w0.4: C17.2@52.688,96.593 52.688,94.145 U19.5@52.484,93.942 65.442,93.942 v1(65.45,93.95) ; v1(53.95,68) 54.4,68.45 58.9,68.45 v1(59.55,69.1) ; v1(54.8,39.5) 60.05,39.5 60.6,40.05 63.05,40.05 v1(63.4,39.7) ; v1(63.15,11.45) 63.2,11.5 75.55,11.5 76.588,12.538 R67.2@76.588,13.193 77.606,13.193 v1(78.447,12.353) ; v1(78.447,12.353) 78.607,12.193 C33.2@78.607,10.288
  Bottom Layer w0.4: v1(53.95,68) 53.95,61.9 54.45,61.4 54.45,39.85 v1(54.8,39.5) ; v1(59.55,69.1) 62.85,72.4 62.85,77.2 65.45,79.8 v1(65.45,93.95) ; v1(63.15,11.45) 63.2,11.5 63.2,31.7 64.35,32.85 64.35,37.75 63.4,38.7 v1(63.4,39.7) ; 73.65,42.35 73.65,16.15 76.6,13.2 77.505,13.2 78.4,12.305 v1(78.447,12.353)
+5V: C11.2 C15.2 C56.1 C102.1 JP1.19 JP1.20 JP4.19 K1.4 R17.2 R18.2 R19.2 R29.1 R50.2 R72.2 R73.1 R115.2 R116.2 R121.2 R123.2 R124.2 R125.2 U5.8 U7.6 U9.7 U12.3 U19.1 U19.3 U101.3 U104.3 | length 581.1
  Top Layer w0.4: U19.1@50.334,93.942 48.558,93.942 48.55,93.933 48.55,92.05 48.558,92.042 U19.3@50.334,92.042 50.35,92.026 50.35,88.65 ; U9.7@77.982,19.611 77.982,18.368 78.5,17.85 82.7,17.85 83.7,18.85 91.5,18.85 R72.2@91.55,18.8 ; 87.95,18.85 87.995,18.805 C15.2@87.995,16.802 ; U5.8@90.096,24.34 91.59,24.34 v1(91.7,24.45) ; R73.1@91.45,21.3 91.509,21.241 R72.2@91.509,18.714 ; R50.2@107.738,112.893 108.693,112.893 109.05,113.25 v1(109.05,115) ; U12.3@119.289,58.862 121.338,58.862 v1(121.4,58.8) ; v1(121.562,65.462) U7.6@123.389,65.462
  Top Layer w0.6: v1(43.35,30.45) 54.134,30.45 K1.4@54.19,30.394 ; 51.6,30.45 51.693,30.357 R29.1@51.693,27.912 ; v1(92.05,15) 92.286,15.236 97.514,15.236 97.75,15 134.45,15 134.959,15.509 R121.2@136.786,15.509 ; R116.2@96.414,11.791 96.414,15.236 ; 105.05,15 105.114,14.936 R115.2@105.114,11.791 ; R19.2@113.914,11.791 113.914,14.914 113.95,14.95 ; R18.2@122.514,11.791 122.514,14.964 122.55,15 ; v1(131.15,15) 131.214,14.936 R17.2@131.214,11.791 ; v1(131.15,23.55) R123.2@136.786,23.55 ; v1@131.159,31.609 R124.2@136.786,31.609
  Top Layer w0.7: v1(109.5,71.6) 110.1,71 126.3,71 128.05,69.25 134.55,69.25 135.7,68.1 141.4,68.1 142.5,67 164.8,67 167.85,63.95 209.35,63.95 213.525,68.125 JP1.19@233.589,68.125 ; v1(183.85,34.25) 183.914,34.186 R125.2@183.914,32.991
  Top Layer w1: JP4.19@45,88.22 46.62,88.22 47.05,88.65 61.2,88.65 64.95,84.9 100.65,84.9 101.45,84.1 108.2,84.1 v1(109,84.9) ; v1(109.05,115) 109.062,114.988 123.762,114.988 124.361,114.389 C102.1@129.294,114.389 C102.1@128.696,114.988 ; C102.1@129.2,114.4 129.2,108.5 131.8,105.9 132.1,105.9 133.8,105.9 134.157,105.543 140.507,105.543 142.3,103.75 C11.2@142.3,101.9
  Bottom Layer w0.4: v1(43.35,30.45) 42.45,31.35 42.45,87 43.67,88.22 JP4.19@45,88.22 ; v1(91.7,24.45) 91.5,24.25 91.5,17.65 92.05,17.1 v1(92.05,15) ; v1(121.4,58.8) 121.5,58.9 v1(121.5,71) ; v1(183.85,34.25) v1(183.85,63.95)
  Bottom Layer w0.6: v1(129.65,69.25) 129.65,55 131.15,53.5 v1(131.15,15)
  Bottom Layer w0.7: v1(109,84.9) 109,72.1 v1(109.5,71.6) ; v1(227.45,68.1) 227.475,68.125 JP1.20@233.589,68.125
  Bottom Layer w1: v1@109.05,84.95 v1(109.05,115)
  other v1: 91.5,20 131.15,31.6
+48V: FU100.1 JP1.5 JP1.6 R56.2 | length 52.9
  Top Layer w0.4: R56.2@217.788,90.093 220.031,87.85 223.7,87.85 v1(225.3,86.25)
  Top Layer w1: v1(215.8,106.7) 217.3,106.7 v1(217.4,106.6) ; v1(225.3,86.25) 225.625,85.925 JP1.5@233.589,85.925
  Bottom Layer w1: v1(215.8,106.7) 217.45,106.7 v1@217.475,106.675 ; v1(217.4,106.6) 221,103 221,90.6 225.675,85.925 JP1.6@233.589,85.925
+IAKB: JP1.39 JP1.40 R62.1 R63.2 | length 201.3
  Top Layer w0.4: v1@68.8,29.25 68.838,29.212 R63.2@70.393,29.212 ; v1(70,42.2) 70.7,41.5 86.8,41.5 v1(87.55,42.25) 91.9,42.25 92.85,43.2 100.3,43.2 101.45,44.35 105.85,44.35 107.384,45.884 122.584,45.884 123.8,47.1 133.9,47.1 134.5,47.7 139.45,47.7 139.9,47.25 186.6,47.25 189.5,44.35 211.4,44.35 213.05,42.7 v1(226.9,42.7) 226.925,42.725 JP1.39@233.589,42.725 ; R62.1@87.15,32 87.178,32.028 87.3,32.15 v1@87.3,33.55
  Bottom Layer w0.4: v1@68.8,29.25 68.1,29.95 68.1,35.9 70,37.8 v1(70,42.2) ; v1@87.3,33.55 87.3,42 v1(87.55,42.25) ; v1(226.9,42.7) 226.925,42.725 JP1.40@233.589,42.725
  other v1: 68.5,29.2 87.3,33.8
+UOUT: 
-5V: C13.1 C16.2 C57.2 C105.2 JP4.18 U9.4 U102.1 | length 189.9
  Top Layer w0.4: JP4.18@45,85.68 47.33,85.68 48.15,86.5 55.4,86.5 55.9,86 62.05,86 64.25,83.8 100.05,83.8 101.95,81.9 114.697,81.9 C57.2@115.688,80.909
  Top Layer w0.6: C16.2@67.298,23.595 67.298,24.548 68.2,25.45 69.9,25.45 70.55,26.1 v1(74.7,26.1) 75.442,25.358 U9.4@75.442,24.811 ; v1(77.75,48.9) 87.4,48.9 88.7,50.2 97.1,50.2 98.25,51.35 103.6,51.35 106.9,54.65 v1(115.7,54.65)
  Top Layer w1: v1(115.85,89.2) 117.561,89.2 ; C105.2@117.561,92.794 117.561,87.939 U102.1@117.7,87.8
  Bottom Layer w0.6: v1(74.7,26.1) 75.45,26.85 75.45,46.6 v1(77.75,48.9) ; v1(115.7,54.65) 115.7,80.897 C57.2@115.688,80.909 115.85,81.071 v1(115.85,89.2) v1@115.7,89.05
-5V_IZ: 
-48V: C100.2 C106.2 C114.2 C117.2 JP1.1 JP1.2 Q101.3 R109.2 U100.4 | length 117.4
  Top Layer w1: C114.2@157.088,102.293 157.125,102.331 171.569,102.331 ; U100.4@157.284,105.983 157.284,102.266 157.325,102.225 157.35,102.2 C114.2@157.35,102.25 ; Q101.3@171.569,103.665 171.569,102.331 ; 171.6,102.3 171.569,102.331 ; 171.95,102.15 173.8,100.3 218.9,100.3 220.6,98.6 220.6,93.15 222.75,91 JP1.1@233.589,91 ; C106.2@199.285,102.101 199.293,100.393 199.3,100.385 199.3,100.35 ; v1(225.05,90.95) v1(227.35,90.95)
  Bottom Layer w1: C100.2@153.95,119.9 153.989,119.861 153.989,108.711 156.717,105.983 U100.4@157.284,105.983 ; v1(225.05,90.95) 225.1,91 JP1.2@233.589,91